# EAGLE board Dimmer (EAGLE 6.6.0)

Size 100 x 80 mm. Coordinates in mm from the lower left corner, seen from the top.
Outline: 0,0 100,0 100,80 0,80 0,0
Copper layers (1*16): Top 0.035mm / dielectric 1.5mm / Bottom 0.035mm
Design rules "default": minimum track width 10mil, minimum drill 24mil, track to track 8mil, track to pad 8mil, pad to pad 8mil, via to via 8mil, smd to smd 8mil, copper to edge 40mil, drill to drill 8mil, minimum pad ring 10mil, minimum via ring 8mil, stop-mask expansion 4mil, vias tented up to drill 0mil, thermal gap 10mil

## Footprints (pad centres in the part's own frame; a part is rotated, then mirrored left to right if it is on the bottom)
TERMBLOCK_1X2-3.5MM = drill 1 pad 2.184: 1 1.8,0; 2 -1.7,0
B40S = smd 1.5 x 1.7: + -2.55,-4.5; - 2.55,-4.5; AC1 -2.55,4.5; AC2 2.55,4.5
1X04_LONGPADS = drill 1.118 pad 1.88 long: 1 0,0; 2 2.54,0; 3 5.08,0; 4 7.62,0
CHIPLED_0603 = smd 0.8 x 0.8: A 0,-0.75; C 0,0.75
DIL6-SMD = smd 1.78 x 1.52: 1 -2.54,-4.645; 2 0,-4.645; 3 2.54,-4.645; 4 2.54,4.645; 5 0,4.645; 6 -2.54,4.645
R2512 = smd 1.8 x 3.2: 1 -2.8,0; 2 2.8,0
R0603 = smd 1 x 1.1: 1 -0.85,0; 2 0.85,0
SOT223 = smd 1.219 x 2.235: 1 -2.311,-3.099; 2 0,-3.099; 3 2.311,-3.099 | smd 3.6 x 2.2: 4 0,3.099

## Placement (x,y rotation side)
AC_120V  [TERMBLOCK_1X2-3.5MM]  64.77,39.37 90 top
AC_LOAD  [TERMBLOCK_1X2-3.5MM]  64.77,26.67 90 top
B1  RECTIFIER-B40S  [B40S]  43.18,48.26 270 top
JP1  [1X04_LONGPADS]  6.35,31.75 90 top
LED1  [CHIPLED_0603]  25.4,36.83 270 top
OK1  MOC3032S  [DIL6-SMD]  24.13,26.67 270 top
OK2  4N25SM  [DIL6-SMD]  27.94,48.26 90 top
R1  120k  [R2512]  59.69,59.69 0 top
R2  330  [R0603]  20.32,39.37 180 top
R3  120k  [R2512]  59.69,50.8 0 top
R4  470  [R0603]  16.51,34.29 270 top
R5  10k  [R0603]  16.51,45.72 90 top
R6  1k  [R2512]  36.83,33.02 0 top
U$1  TRIACSMD  [SOT223]  48.26,25.4 270 top

## Library data of the parts
AC_120V AC_LOAD = microbuilder
B1 = rectifier
JP1 = SparkFun-Connectors
LED1 = adafruit
OK1 = optocoupler; MF: FAIRCHILD SEMICONDUCTOR; MPN: MOC3032S-M; OC_FARNELL: unknown; OC_NEWARK: 05C2871
OK2 = optocoupler; MF: FAIRCHILD SEMICONDUCTOR; MPN: 4N25SM; OC_FARNELL: 1021152; OC_NEWARK: 34C2020
R1-R6 = resistor
U$1 = SparkFun-DiscreteSemi

## Nets
+3V3: JP1.4 R5.2
GND: JP1.1 LED1.C OK1.2 OK2.4
N$1: JP1.3 OK2.5 R5.1
N$2: B1.AC1 R1.1 R3.1
N$3: B1.- OK2.1
N$4: AC_120V.2 AC_LOAD.1 B1.AC2
N$5: OK1.6 R6.1
N$6: LED1.A R2.1
N$7: OK1.1 R4.2
N$8: JP1.2 R2.2 R4.1
N$9: OK1.4 U$1.3
N$10: AC_LOAD.2 U$1.2
N$11: AC_120V.1 R1.2 R3.2 R6.2 U$1.1
N$12: B1.+ OK2.2

## Tracks (layer width: path | path; a pad name or v marks a point on that pad's centre or on a via)
+3V3  (1 unrouted)
GND  (3 unrouted)
N$1  (2 unrouted)
N$2  (2 unrouted)
N$3  (1 unrouted)
N$4  (2 unrouted)
N$5  (1 unrouted)
N$6  (1 unrouted)
N$7  (1 unrouted)
N$8  (2 unrouted)
N$9  (1 unrouted)
N$10  (1 unrouted)
N$11  (4 unrouted)
N$12  (1 unrouted)